# Altium PCB BLDC_BridgeBoard_V1_PCB.PcbDoc
Units mm, origin at the board's own origin, x right, y up, seen from the top; angles counter-clockwise.
Board outline 100 x 87 mm, 4 copper layers (Top Layer, Int1 (GND), Int2 (V12), Bottom Layer), stack 1.369 mm thick; 79 components, 44 nets, 261 pads, 93 vias.
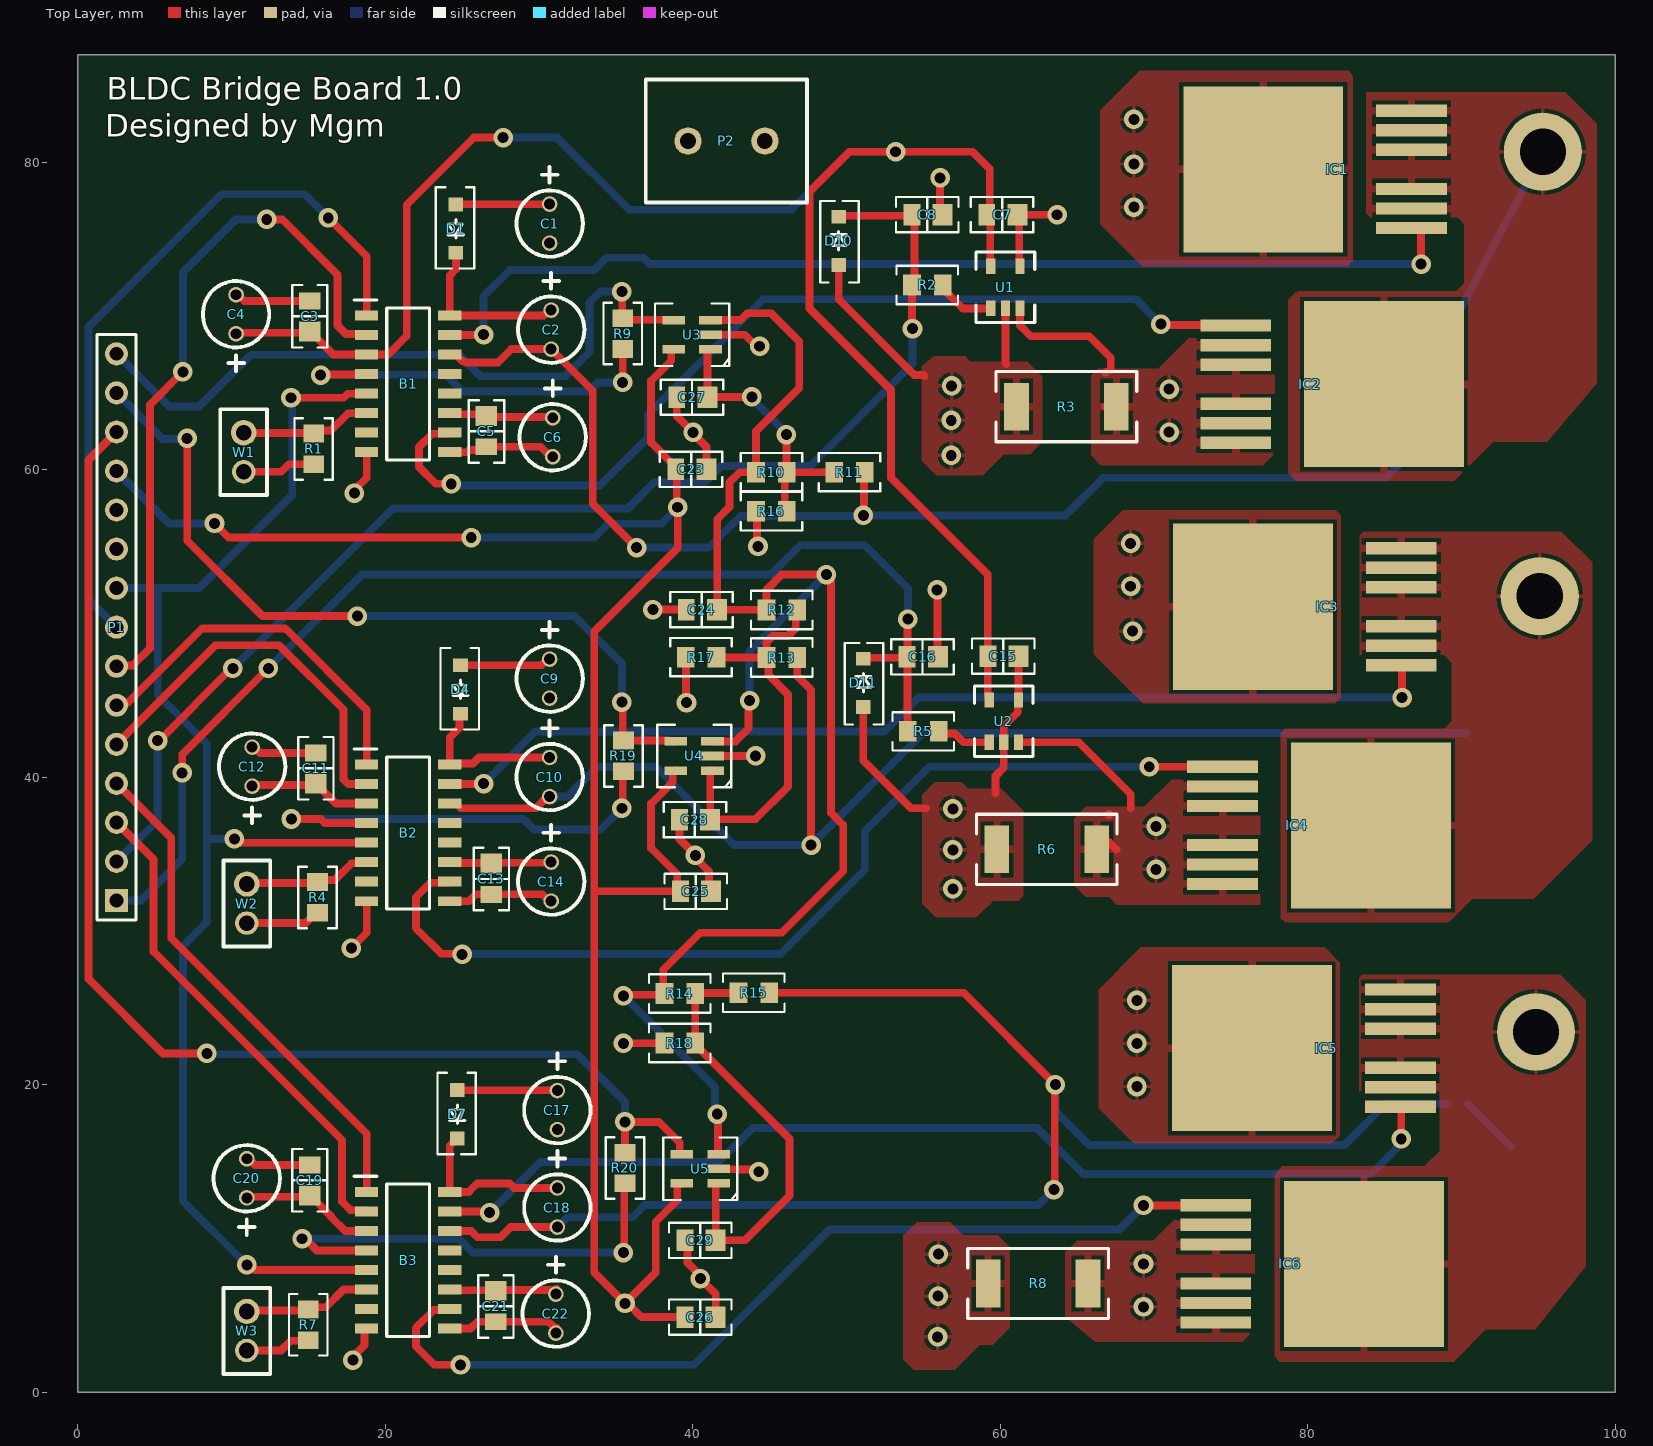
[diagram p0: Top Layer view]
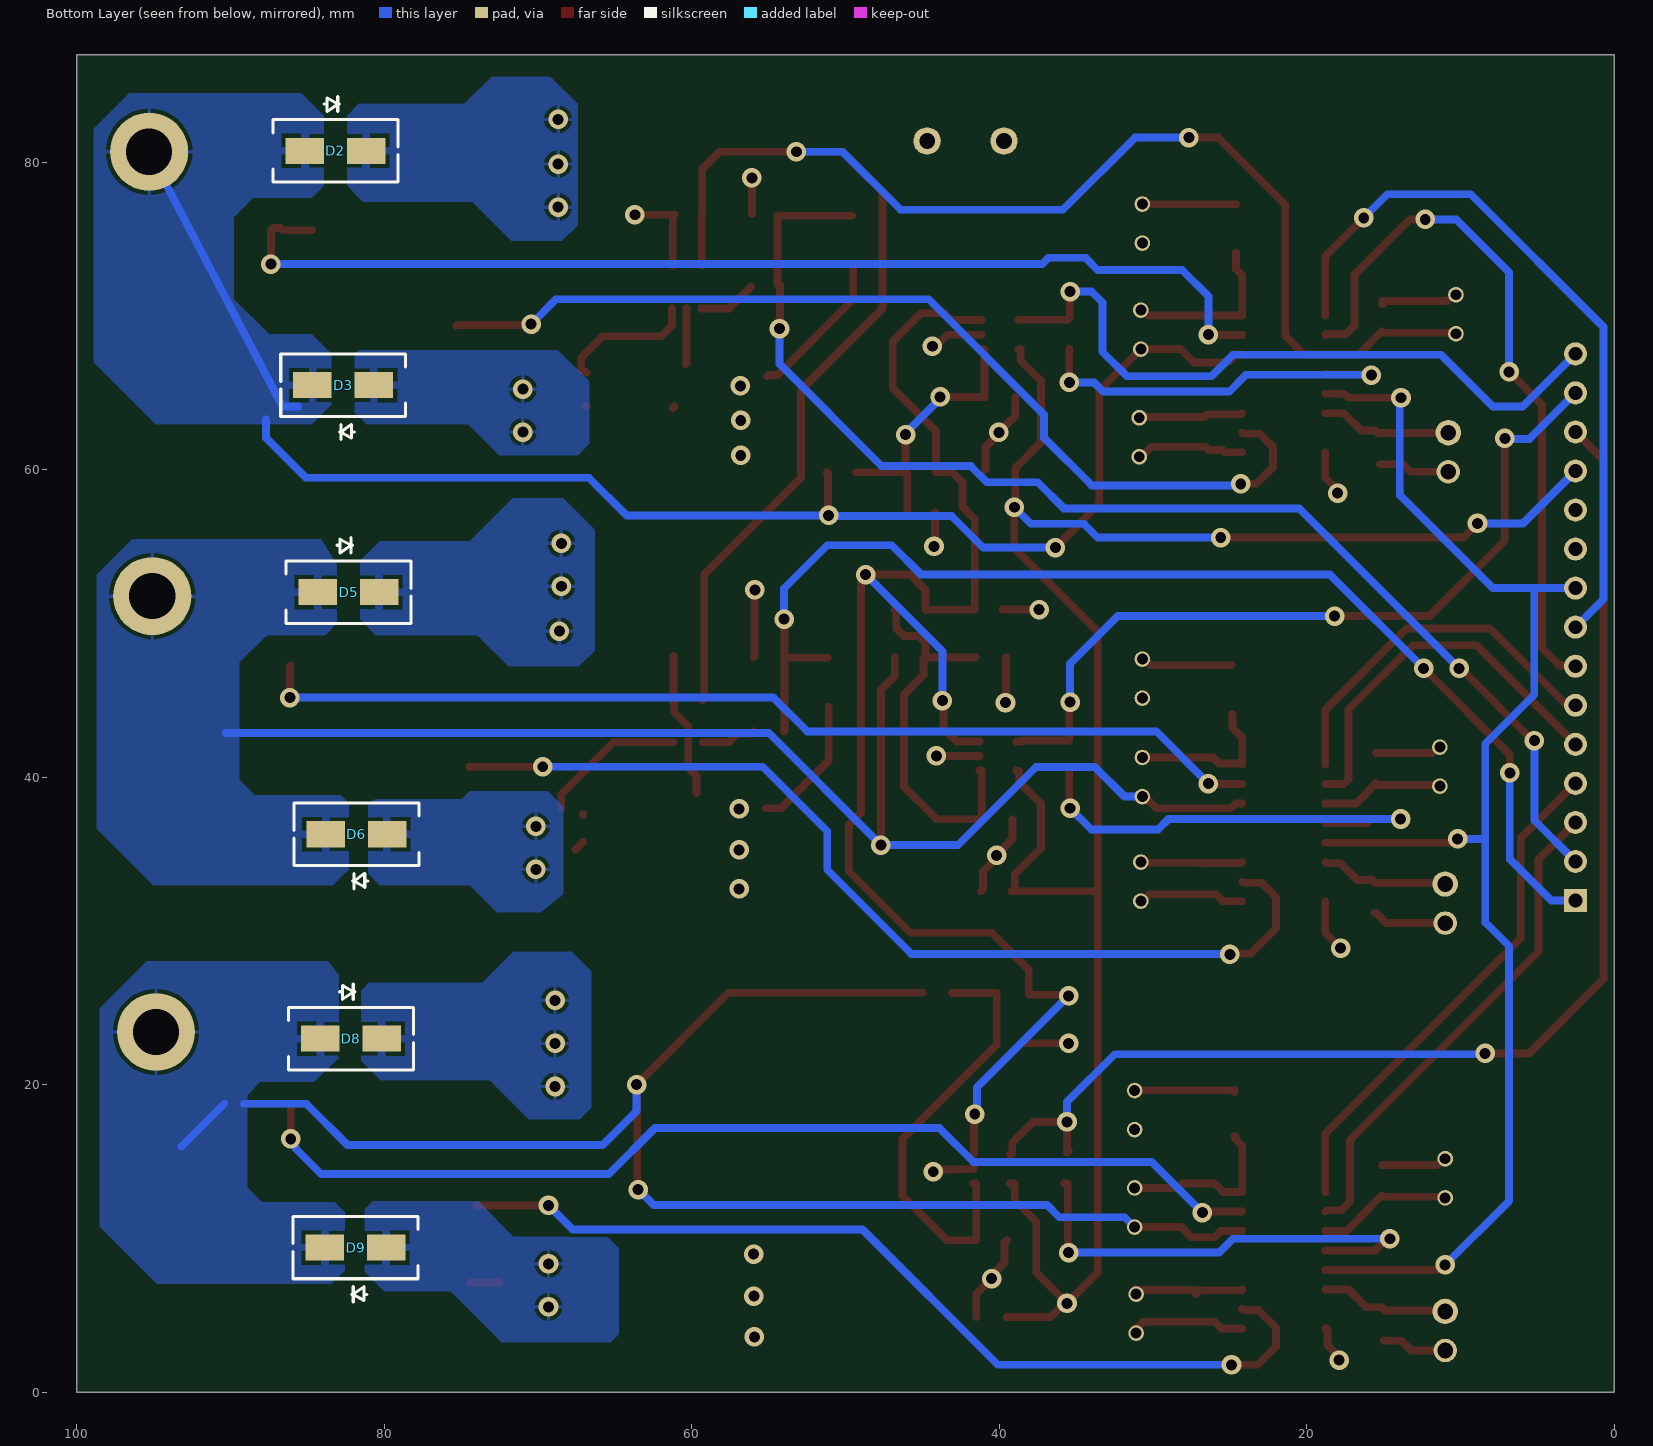
[diagram p1: Bottom Layer view, seen from below]
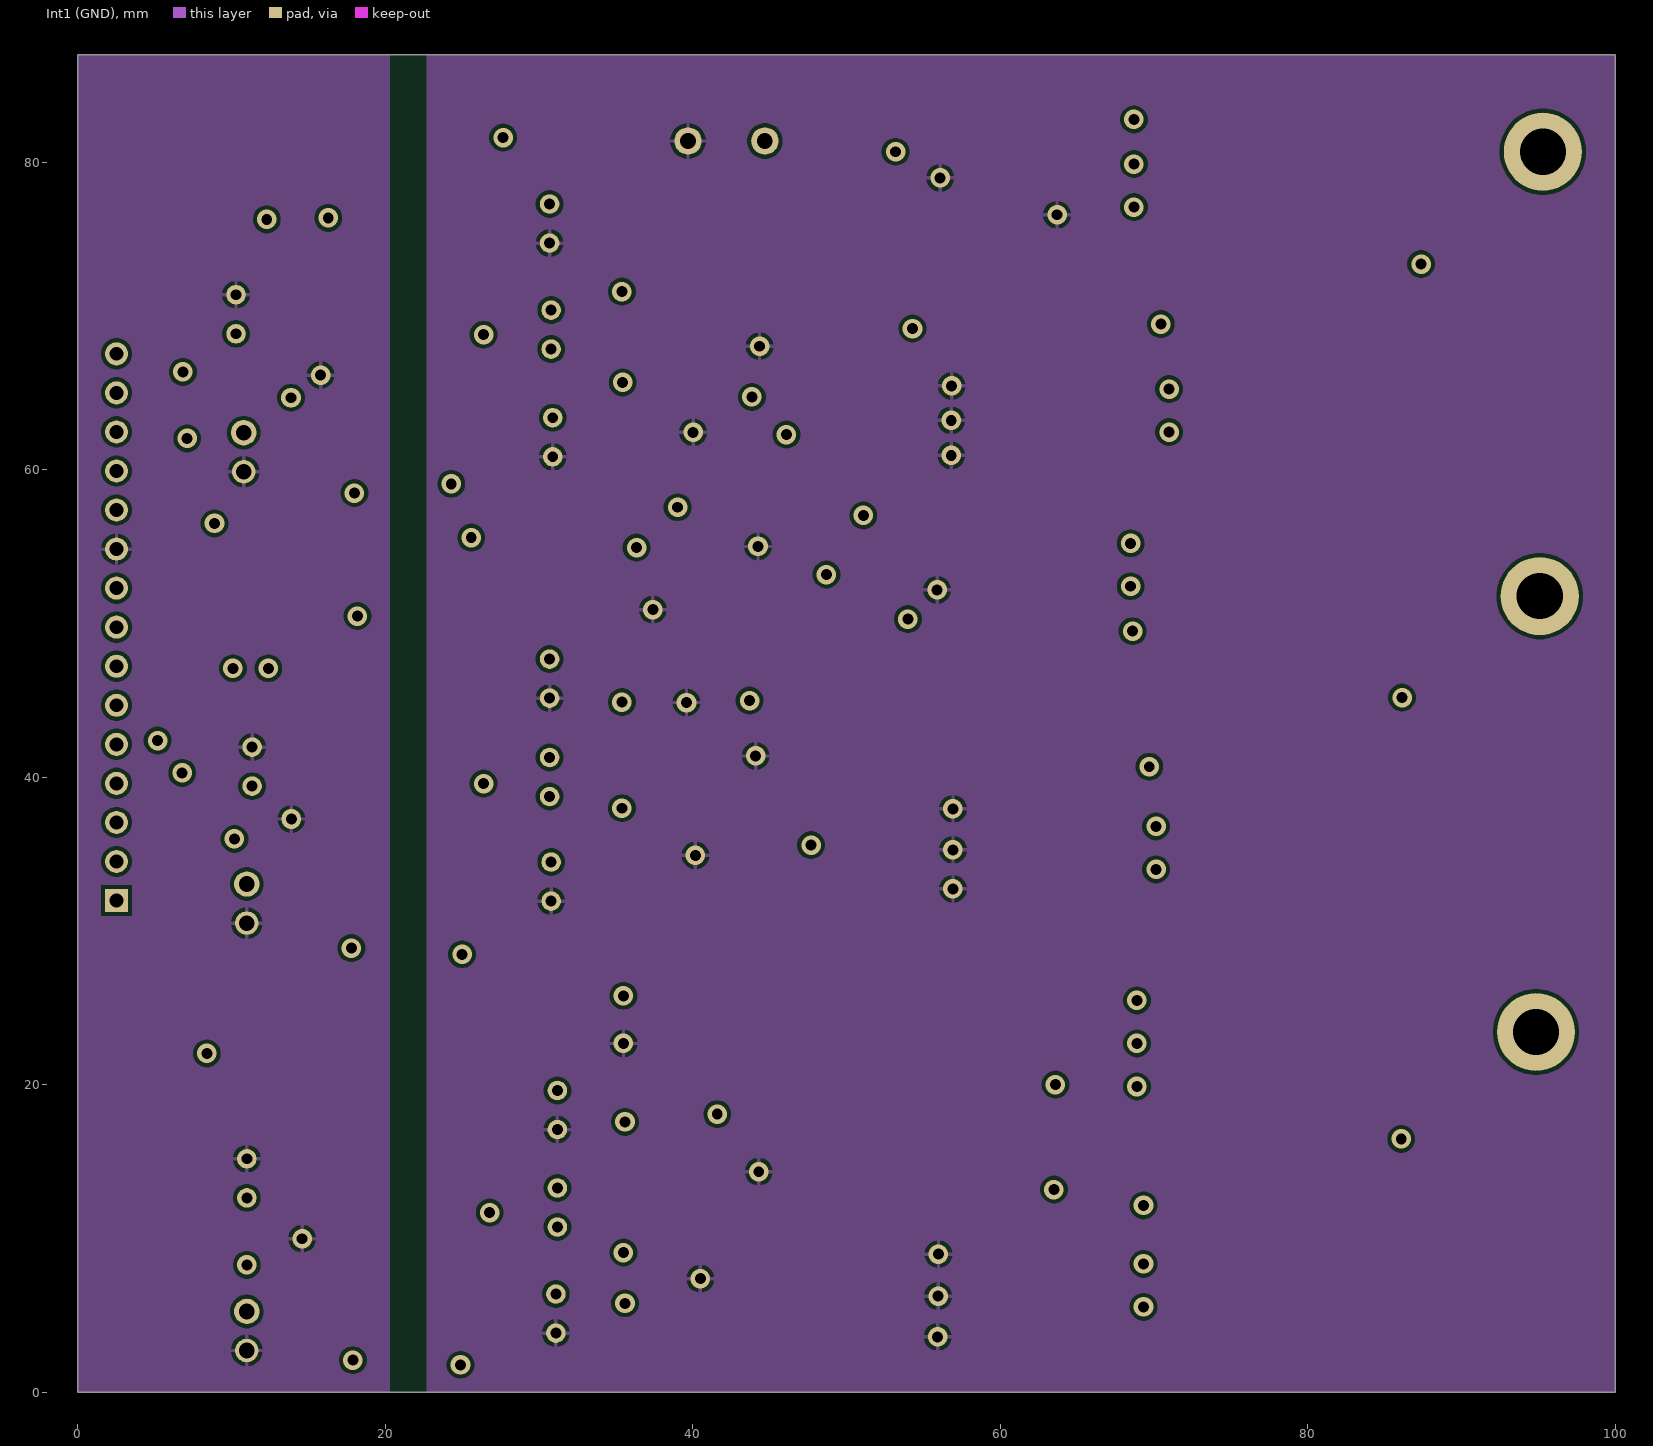
[diagram p2: Int1 (GND)]
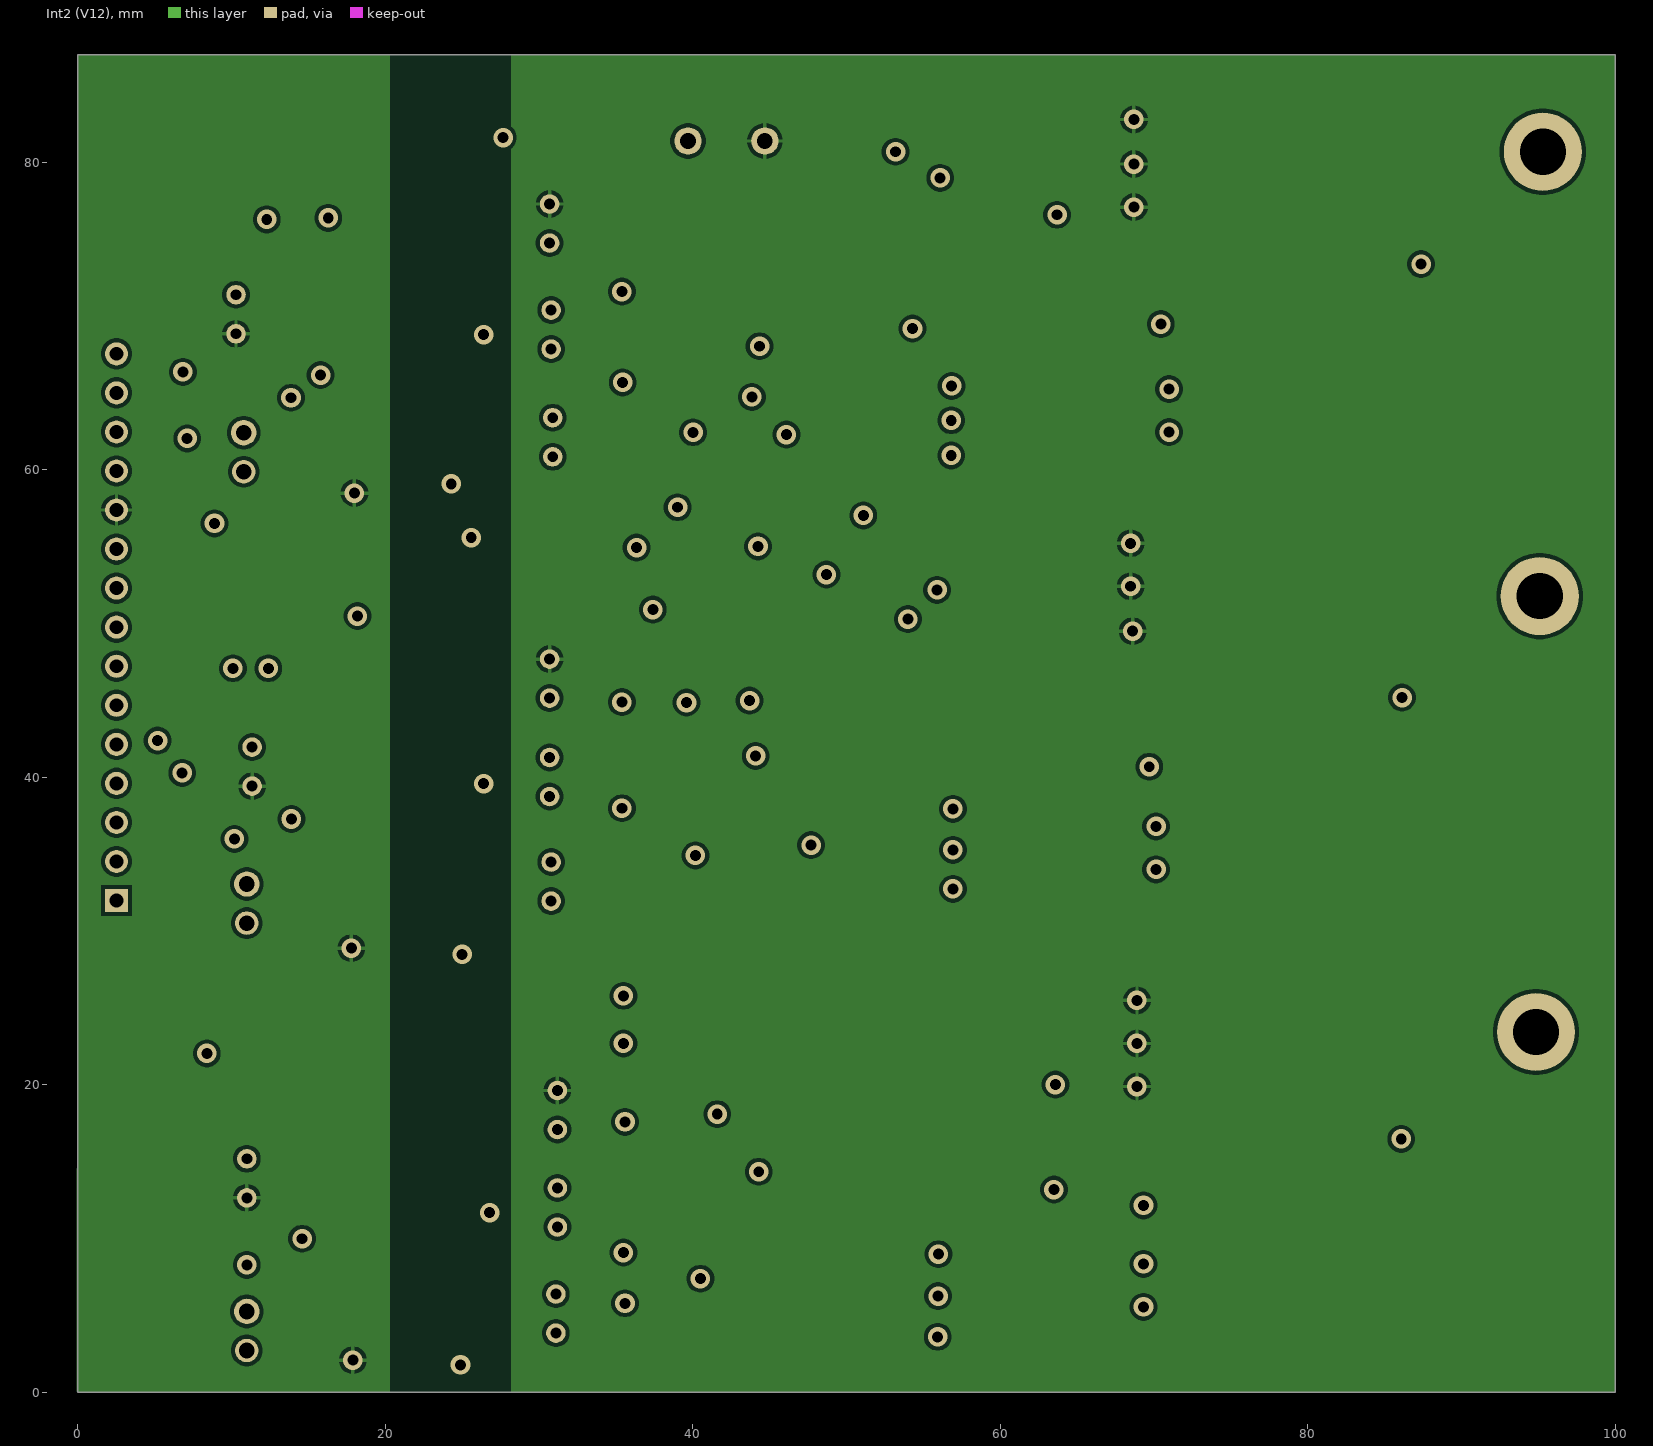
[diagram p3: Int2 (V12)]
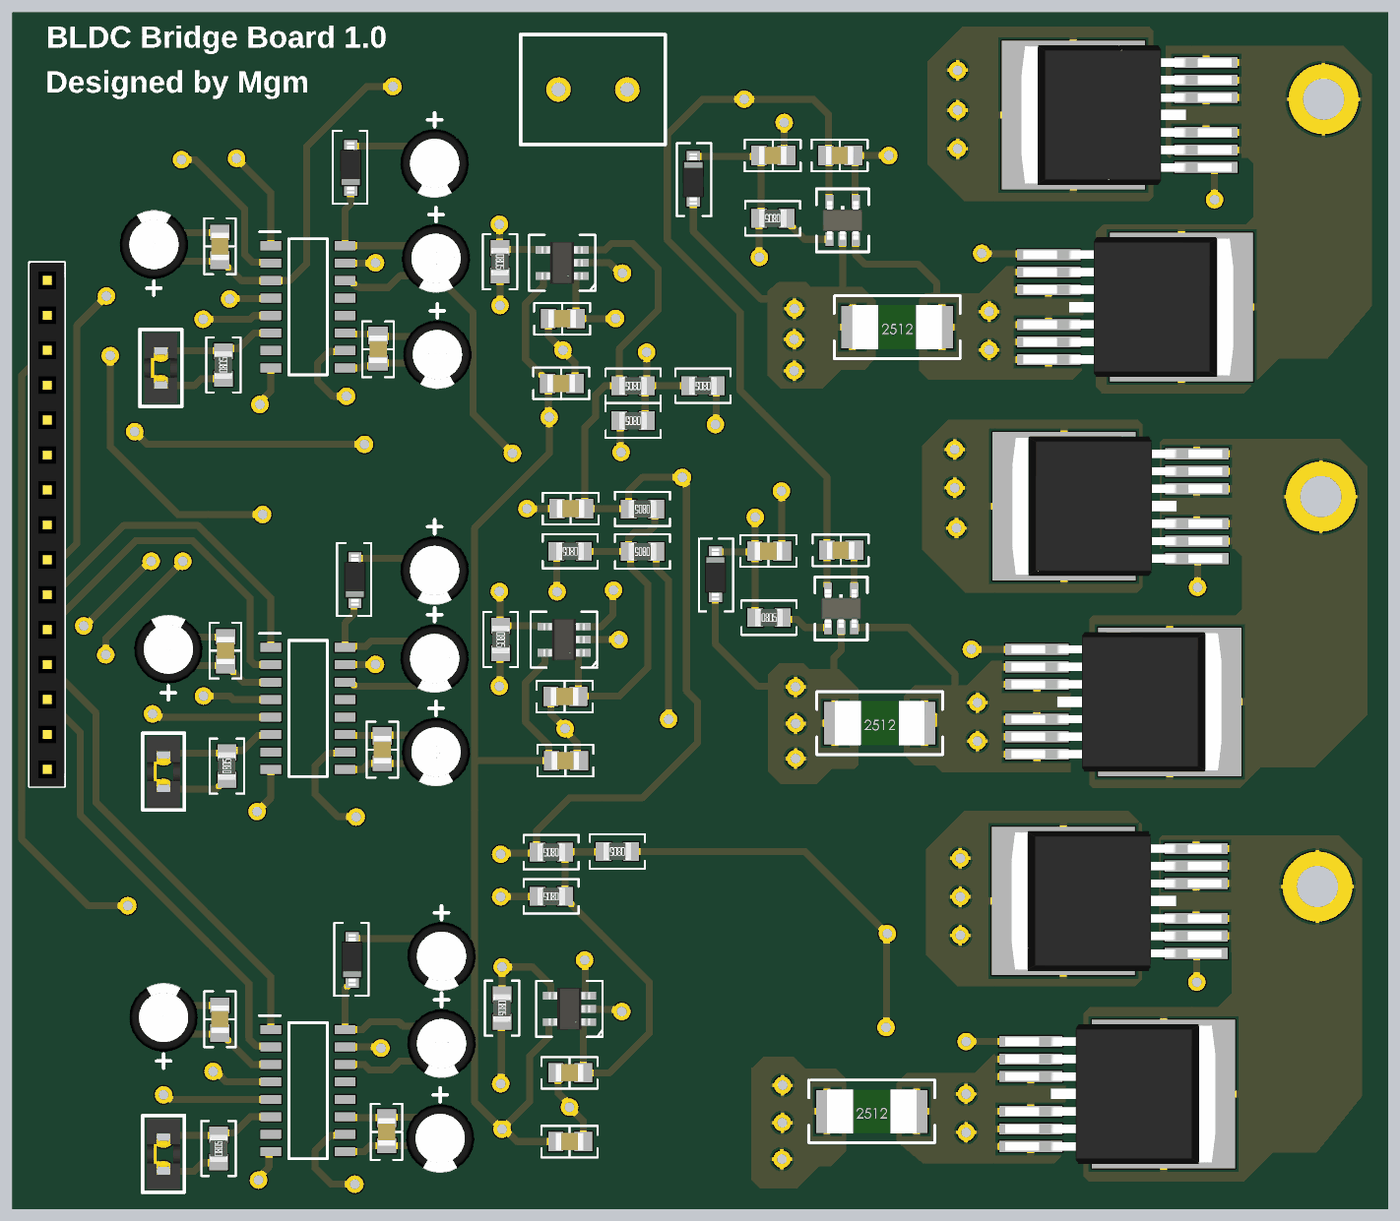
[diagram p4: 3D render of the assembled board from above, using the file's embedded part models]
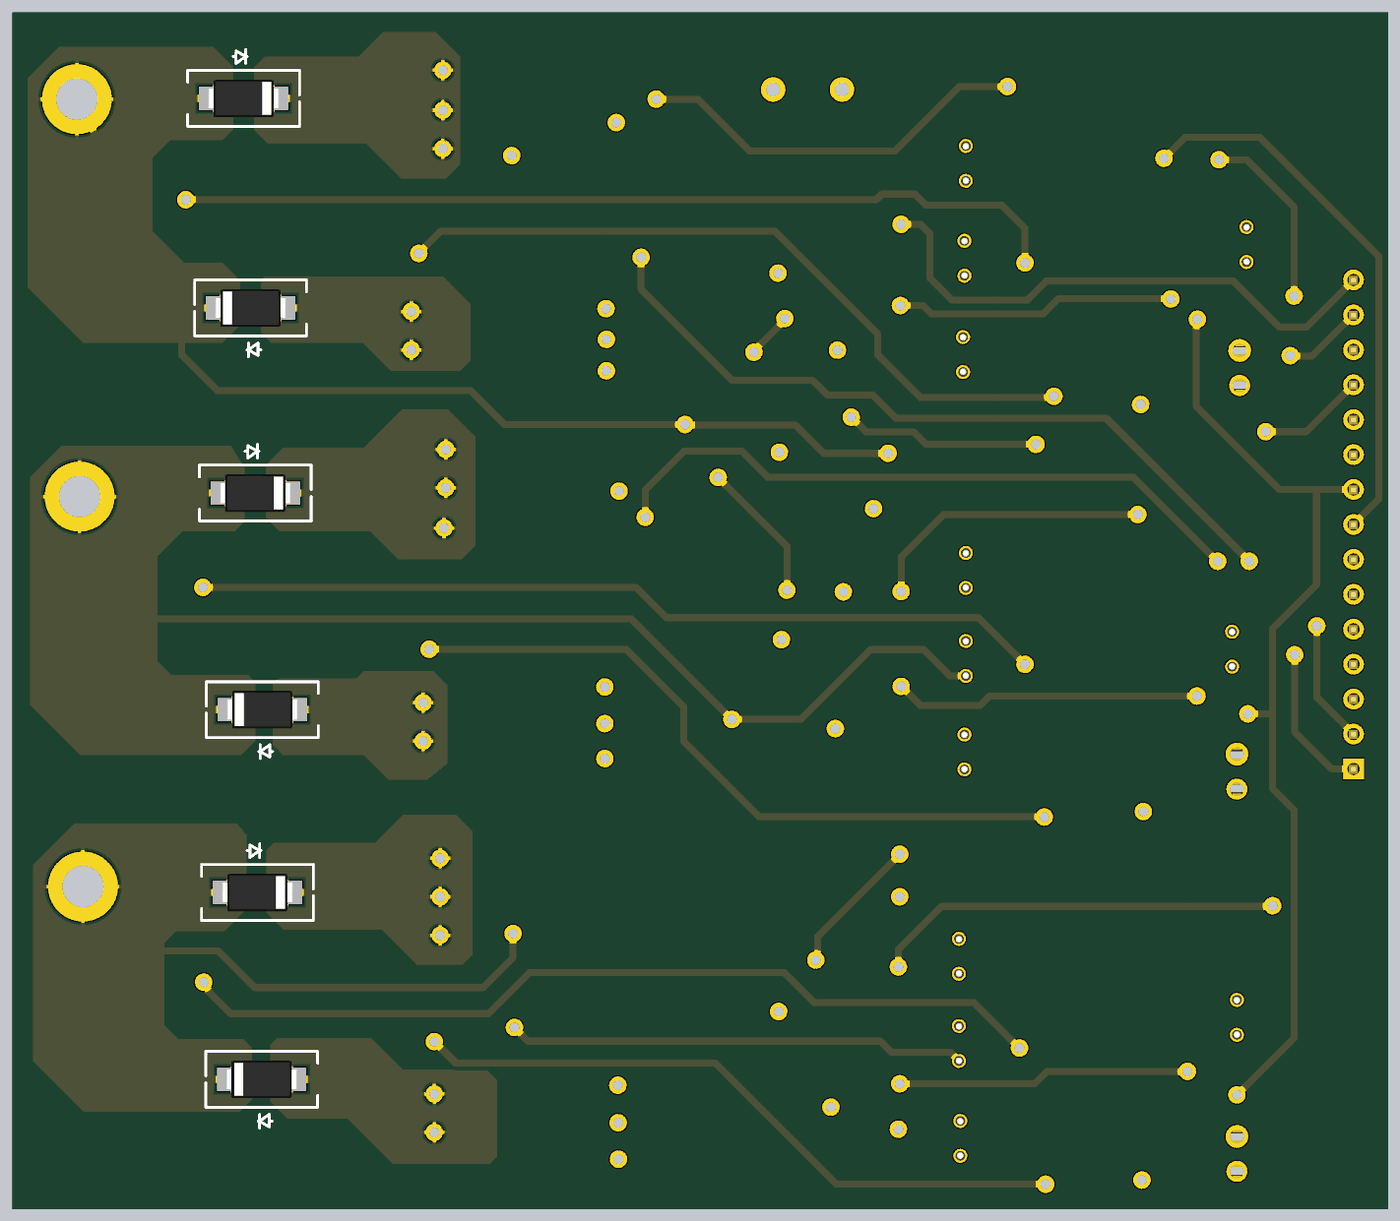
[diagram p5: 3D render of the assembled board from below, using the file's embedded part models]

## Layer stack, top to bottom
Top Solder: solder mask 0.0254, SM-001, Dk 4
Top Layer: signal copper 0.035
Dielectric 1: prepreg 0.1295, PP-017, Dk 4.3
Dielectric 2: prepreg 0.1295, PP-017, Dk 4.3
Int1 (GND): signal copper 0.035
Dielectric 3: core 0.7112, Core-039, Dk 4.8
Int2 (V12): signal copper 0.035
Dielectric 4: prepreg 0.1295, PP-017, Dk 4.3
Dielectric 5: prepreg 0.1295, PP-017, Dk 4.3
Bottom Layer: signal copper 0.035
Bottom Solder: solder mask 0.0254, SM-001, Dk 4

## Board outline
0,0 100,0 100,87 0,87

## Design rules (kind name [scope] priority, off if disabled: settings)
Clearance [All] p1: gap=0.254 ignorepadtopadclearanceinfootprint=FALSE except(0: Arc-Hole Track-Hole SMDPad-Hole THPad-Hole Via-Hole Fill-Hole Poly-Hole Region-Hole Text-Hole)
HoleSize [All] p1: absolutevalues=TRUE maxlimit=4 minlimit=0.025 maxpercent=80.000 minpercent=20.000
MinimumSolderMaskSliver [All] p1: minsoldermaskwidth=0.22
PolygonConnect PolygonConnect_2 [(IsNamedPolygon('PolygonBigThermal'))] p1: thpad.connectstyle=Relief thpad.reliefconductorwidth=2 thpad.reliefentries=4 thpad.polygonreliefangle="90 Angle" thpad.airgapwidth=0.254 smdpad.connectstyle=Relief smdpad.reliefconductorwidth=2 smdpad.reliefentries=4 smdpad.polygonreliefangle="90 Angle" smdpad.airgapwidth=0.254 via.connectstyle=Direct via.reliefconductorwidth=0.254 via.reliefentries=4 via.polygonreliefangle="90 Angle" via.airgapwidth=0.254
PolygonConnect PolygonConnect_1 [(IsNamedPolygon('PolygonDirect'))] p2: connectstyle=Direct reliefconductorwidth=2 reliefentries=4 polygonreliefangle="90 Angle" airgapwidth=0.254
PolygonConnect [All] p3: thpad.connectstyle=Relief thpad.reliefconductorwidth=0.254 thpad.reliefentries=4 thpad.polygonreliefangle="90 Angle" thpad.airgapwidth=0.254 smdpad.connectstyle=Relief smdpad.reliefconductorwidth=0.508 smdpad.reliefentries=4 smdpad.polygonreliefangle="90 Angle" smdpad.airgapwidth=0.254 via.connectstyle=Relief via.reliefconductorwidth=0.254 via.reliefentries=4 via.polygonreliefangle="90 Angle" via.airgapwidth=0.254
RoutingVias [All] p1: holewidth=0.711 width=1.27 viastyle="Through Hole" minholewidth=0.711 minwidth=1.27 maxholewidth=0.711 maxwidth=1.27
SolderMaskExpansion [All] p1: expansion=0.102 istentingtop=FALSE
UnRoutedNet [All] p1: checkbadconnections=TRUE
Width [All] p1: maxlimit=0.762 minlimit=0.254 preferedwidth=0.508 midlayer1_maxwidth=0.254 midlayer1_prefwidth=0.254 midlayer2_maxwidth=0.254 midlayer2_prefwidth=0.254 minimp=50.000000 maximp=50.000000 favimp=50.000000
27 further rules are at their usual default settings.

## Classes and differential pairs
component class U_5_ZeroCrossingDetector: C23 C24 C25 C26 C27 C28 C29 R9 R10 R11 R12 R13 R14 R15 R16 R17 R18 R19 R20 U3 U4 U5
component class U_4_Connectors: P1 P2
component class U_3_FET_C: B3 C17 C18 C19 C20 C21 C22 D7 D8 D9 IC5 IC6 R7 R8 W3
component class U_2_FET_B: B2 C9 C10 C11 C12 C13 C14 C15 C16 D4 D5 D6 D11 IC3 IC4 R4 R5 R6 U2 W2
component class U_1_FET_A: B1 C1 C2 C3 C4 C5 C6 C7 C8 D1 D2 D3 D10 IC1 IC2 R1 R2 R3 U1 W1

## Components (designator, comment, footprint, x,y, rotation, side; value= is the part's Value field where it differs from the comment)
B1 "SI8238BB-D-IS1" SOIC127P600X175-16N 21.5,65.6 r0 top
B2 "SI8238BB-D-IS1" SOIC127P600X175-16N 21.5,36.395 r0 top
B3 "SI8238BB-D-IS1" SOIC127P600X175-16N 21.5,8.6 r0 top
C1 "Cap Pol1" CAPACITORRADIALELECTROLYTIC 30.7,77.3 r270 top value=1uF
C2 "Cap Pol1" CAPACITORRADIALELECTROLYTIC 30.8,70.4 r270 top value=CB
C3 "0.1 µF" "CAP 0805_2012" 15.1,70 r270 top
C4 "Cap Pol1" CAPACITORRADIALELECTROLYTIC 10.3,68.86 r90 top value=1uF
C5 "0.1 µF" "CAP 0805_2012" 26.588,62.512 r90 top
C6 "Cap Pol1" CAPACITORRADIALELECTROLYTIC 30.9,63.4 r270 top value=10uF
C7 "0.1 µF" "CAP 0805_2012" 60.128,76.608 r0 top
C8 "1 nF" "CAP 0805_2012" 55.264,76.608 r0 top
C9 "Cap Pol1" CAPACITORRADIALELECTROLYTIC 30.7,47.7 r270 top value=1uF
C10 "Cap Pol1" CAPACITORRADIALELECTROLYTIC 30.7,41.3 r270 top value=CB
C11 "0.1 µF" "CAP 0805_2012" 15.5,40.6 r270 top
C12 "Cap Pol1" CAPACITORRADIALELECTROLYTIC 11.35,39.435 r90 top value=1uF
C13 "0.1 µF" "CAP 0805_2012" 26.9,33.4 r90 top
C14 "Cap Pol1" CAPACITORRADIALELECTROLYTIC 30.8,34.5 r270 top value=10uF
C15 "0.1 µF" "CAP 0805_2012" 60.2,47.9 r0 top
C16 "1 nF" "CAP 0805_2012" 54.954,47.843 r0 top
C17 "Cap Pol1" CAPACITORRADIALELECTROLYTIC 31.2,19.64 r270 top value=1uF
C18 "Cap Pol1" CAPACITORRADIALELECTROLYTIC 31.2,13.3 r270 top value=CB
C19 "0.1 µF" "CAP 0805_2012" 15.1,13.8 r270 top
C20 "Cap Pol1" CAPACITORRADIALELECTROLYTIC 11,12.66 r90 top value=1uF
C21 "0.1 µF" "CAP 0805_2012" 27.2,5.6 r90 top
C22 "Cap Pol1" CAPACITORRADIALELECTROLYTIC 31.1,6.4 r270 top value=10uF
C23 "1 nF" "CAP 0805_2012" 39.901,60.038 r0 top
C24 "1 nF" "CAP 0805_2012" 40.584,50.922 r0 top
C25 "1 nF" "CAP 0805_2012" 40.2,32.6 r0 top
C26 "1 nF" "CAP 0805_2012" 40.5,4.9 r0 top
C27 "1 nF" "CAP 0805_2012" 39.964,64.736 r0 top
C28 "1 nF" "CAP 0805_2012" 40.144,37.263 r0 top
C29 "1 nF" "CAP 0805_2012" 40.5,9.9 r0 top
D1 "B5819W-TP" SOD-123 24.6,75.7 r270 top
D2 "SK510A-LTP" "DO214AC SMA" 83.186,80.758 r180 bottom
D3 "SK510A-LTP" "DO214AC SMA" 82.678,65.518 r0 bottom
D4 "B5819W-TP" SOD-123 24.9,45.725 r270 top
D5 "SK510A-LTP" "DO214AC SMA" 82.332,52.056 r180 bottom
D6 "SK510A-LTP" "DO214AC SMA" 81.824,36.308 r0 bottom
D7 "B5819W-TP" SOD-123 24.7,18.1 r270 top
D8 "SK510A-LTP" "DO214AC SMA" 82.176,23.016 r180 bottom
D9 "SK510A-LTP" "DO214AC SMA" 81.872,9.427 r0 bottom
D10 "BZT52C3V0-TP" SOD-123 49.5,74.9 r90 top
D11 "BZT52C3V0-TP" SOD-123 51.1,46.15 r90 top
IC1 "IRFS3006TRL7PP" "INFINEON TO-263-7" 80.987,79.552 r180 top
IC2 "IRFS3006TRL7PP" "INFINEON TO-263-7" 81.095,65.582 r0 top
IC3 "IRFS3006TRL7PP" "INFINEON TO-263-7" 80.314,51.104 r180 top
IC4 "IRFS3006TRL7PP" "INFINEON TO-263-7" 80.241,36.88 r0 top
IC5 "IRFS3006TRL7PP" "INFINEON TO-263-7" 80.26,22.394 r180 top
IC6 "IRFS3006TRL7PP" "INFINEON TO-263-7" 79.792,8.36 r0 top
P1 "Header 15" HDR1X15 2.526,31.996 r90 top
P2 "Header 2" "SCREW HEADER 2 (5 MM PITCH)" 42.2,81.4 r0 top
R1 "RDT" "RES 0805_2012" 15.35,61.375 r90 top
R2 "1 kOhms" "RES 0805_2012" 55.264,72.036 r180 top
R3 "60 mOhms" "STACKPOLE CSR2512" 64.314,64.121 r0 top value="500 µOhms"
R4 "RDT" "RES 0805_2012" 15.6,32.2 r90 top
R5 "1 kOhms" "RES 0805_2012" 55,43 r0 top
R6 "60 mOhms" "STACKPOLE CSR2512" 63.042,35.324 r0 top value="500 µOhms"
R7 "RDT" "RES 0805_2012" 15,4.4 r90 top
R8 "60 mOhms" "STACKPOLE CSR2512" 62.466,7.09 r0 top value="500 µOhms"
R9 "10 k" "RES 0805_2012" 35.45,68.875 r270 top
R10 "47 k" "RES 0805_2012" 45.121,59.858 r180 top
R11 "47 k" "RES 0805_2012" 50.201,59.858 r180 top
R12 "47 k" "RES 0805_2012" 45.8,50.9 r180 top
R13 "47 k" "RES 0805_2012" 45.8,47.8 r180 top
R14 "47 k" "RES 0805_2012" 39.167,25.948 r180 top
R15 "47 k" "RES 0805_2012" 43.979,25.997 r180 top
R16 "10 k" "RES 0805_2012" 45.121,57.318 r180 top
R17 "10 k" "RES 0805_2012" 40.55,47.825 r180 top
R18 "10 k" "RES 0805_2012" 39.167,22.73 r180 top
R19 "10 k" "RES 0805_2012" 35.5,41.4 r270 top
R20 "10 k" "RES 0805_2012" 35.6,14.6 r270 top
U1 "INA180A1IDBVR" DBV0005A_N 60.344,71.887 r90 top
U2 "INA180A1IDBVR" DBV0005A_N 60.236,43.662 r90 top
U3 "LMV321IDBVR" DBV5 39.964,68.8 r180 top
U4 "LMV321IDBVR" DBV5 40.1,41.4 r180 top
U5 "LMV321IDBVR" DBV5 40.494,14.55 r180 top
W1 "Jumper" JUMPER_2_POS 10.8,61.155 r90 top
W2 "Jumper" JUMPER_2_POS 11,31.8 r90 top
W3 "Jumper" JUMPER_2_POS 11,4 r90 top

## Footprints (in the part's own frame and the unit in brackets; to place one, negate y for a bottom-side part, rotate by r counter-clockwise, add the part's x,y. Pads: shape width x height; smd on the part's side, far side on the other; paste and mask are expansions set on the pad)
"CAP 0805_2012" [mm] "Chip Capacitor, 2-Leads, Body 2.00x1.20mm, IPC Medium Density"
  rect 1.1x1.4 smd: 1(-1,0)
  rect 1.3x1.4 smd: 2(1,0)
  silkscreen extent -2.03,-1.15 2.03,1.14, body extent -1,-0.64 1,0.64, height 1.26
CAPACITORRADIALELECTROLYTIC [mil]
  round 40 / inner round 50 / far side round 40 hole 28: 1(0,0) 2(100,0)
  silkscreen extent -95,-85 135,85, body extent -48,-98 148,98, height 493
DBV5 [mil]
  rect 58x22 smd mask-99999: 1(-47,37.4) 2(-47,0) 3(-47,-37.4) 4(47,-37.4) 5(47,37.4)
  silkscreen extent -95,-80 95,80, body extent -59,-60 59,60, height 57
DBV0005A_N [mm]
  rect 1x0.6 smd paste+0 mask+0.051: 1(-1.375,0.95) 2(-1.375,0) 3(-1.375,-0.95) 4(1.375,-0.95) 5(1.375,0.95)
  silkscreen extent -2.29,-1.91 2.29,1.91, body extent -1.4,-1.45 1.4,1.45, height 1.2
"DO214AC SMA" [mm] "Molded Diode, 2-Leads, Body 4.30x2.60mm, IPC Medium Density"
  rect 2.5x1.7 smd: 1(-2,0) 2(2,0)
  silkscreen extent -4.06,-2.03 4.06,3.55, body extent -2.6,-1.37 2.6,1.37, height 2.4
HDR1X15 [mm] "Connector; Header; 15 Position"
  rect 1.5x1.5 hole 0.9: 1(0,0)
  round 1.5 hole 0.9: 2(2.54,0) 3(5.08,0) 4(7.62,0) 5(10.16,0) 6(12.7,0) 7(15.24,0) 8(17.78,0) 9(20.32,0) 10(22.86,0) 11(25.4,0) 12(27.94,0) 13(30.48,0) 14(33.02,0) 15(35.56,0)
  silkscreen extent -1.27,-1.27 36.83,1.27, body extent -1.3,-1.29 36.8,1.25, height 8.13
"INFINEON TO-263-7" [mm] "D2-PAK, 7-Pads, Body 7.82x8.52mm (max), IPC Medium Density"
  rect 4.6x0.8 smd: 1(-5.775,3.81) 2(-5.775,2.54) 3(-5.775,1.27) 5(-5.775,-1.27) 6(-5.775,-2.54) 7(-5.775,-3.81)
  rect 10.4x10.8 smd: 8(3.875,0)
  body extent -7.62,-5.08 7.63,5.08, height 4.54
JUMPER_2_POS [mil] "2 pins jumper."
  round 60 hole 40: 1(-50,0)
  round 65 hole 40: 2(50,0)
  silkscreen extent -110,-60 110,60, body extent -102,-47 102,47, height 265
"RES 0805_2012" [mm] "Chip Resistor, 2-Leads, Body 2.00x1.25mm, IPC Medium Density"
  rect 1.15x1.35 smd: 1(-1,0) 2(1,0)
  silkscreen extent -2,-1.25 2,1.25, body extent -1,-0.62 1,0.63, height 0.6
"SCREW HEADER 2 (5 MM PITCH)" [mil]
  round 70 hole 40: 1(-98.43,0) 2(98.43,0)
  silkscreen extent -207,-157 207,157, body extent -198,-177 219,177, height 516
SOD-123 [mm] "SOD, 2-Leads, Body 1.55x3.70mm, IPC Medium Density"
  rect 0.9x0.95 smd: 1(-1.575,0) 2(1.575,0)
  silkscreen extent -2.7,-1.3 2.6,1.2, body extent -1.86,-0.78 1.86,0.77, height 1.35
SOIC127P600X175-16N [mm]
  rect 1.5x0.65 smd: 1(-2.7,4.445) 2(-2.7,3.175) 3(-2.7,1.905) 4(-2.7,0.635) 5(-2.7,-0.635) 6(-2.7,-1.905) 7(-2.7,-3.175) 8(-2.7,-4.445) 9(2.7,-4.445) 10(2.7,-3.175) 11(2.7,-1.905) 12(2.7,-0.635) 13(2.7,0.635) 14(2.7,1.905) 15(2.7,3.175) 16(2.7,4.445)
  silkscreen extent -3.53,-4.95 1.4,5.46
"STACKPOLE CSR2512" [mm] "Chip Resistor, 2-Leads, Body 6.40x3.20mm, IPC Medium Density"
  rect 1.6x3.1 smd: 1(-3.25,0) 2(3.25,0)
  silkscreen extent -4.57,-2.29 4.57,2.29, body extent -3.27,-1.6 3.28,1.6, height 0.5

## Part data
B1 B2 B3: "SILICON LABS - SI8238BB-D-IS1 - DIGITAL ISOLATOR, 30NS, NSOIC-16", Manufacturer_Name="Silicon Labs", Mouser Part Number=634-SI8238BB-D-IS1, Arrow Part Number=SI8238BB-D-IS1, Arrow Price/Stock=https://www.arrow.com/en/products/si8238bb-d-is1/silicon-labs, Datasheet Link=https://datasheet.datasheetarchive.com/originals/distributors/DKDS-37/728994.pdf, Geometry.Height=1.75mm, Manufacturer_Part_Number=SI8238BB-D-IS1, Mouser Price/Stock=https://www.mouser.co.uk/ProductDetail/Silicon-Labs/SI8238BB-D-IS1?qs=p9T7GgSe1IEr3RhvGCWqzw%3D%3D
C1 C2 C4 C6 C9 C10 C12 C14 C17 C18 C20 C22: "Polarized Capacitor (Radial)", LatestRevisionDate=17-Jul-2002, LatestRevisionNote="Re-released for DXP Platform.", PackageDescription="Polarized Capacitor (Radial); 2 Leads", PackageReference=RB7.6-15, Published=8-Jun-2000, Publisher="Altium Limited"
C3 C5 C7 C11 C13 C15 C19 C21: library part CC0805MRX7R9BB104, "CAP CER 0.1UF 50V X7R 0805", Device Package="0805 (2012 Metric)", Manufacturer=Yageo, Operating Temperature="-55°C ~ 125°C", Supplier Part Number 1=311-4351-1-ND, Temperature Coefficient=X7R, Tolerance=±20%, Voltage - Rated=50V, Applications="General Purpose", Capacitance="0.1 µF", ComponentLink1Description=Datasheet, ComponentLink1URL=https://www.yageo.com/upload/media/product/productsearch/datasheet/mlcc/UPY-GPHC_X7R_6.3V-to-50V_18.pdf, ComponentLink2Description="DigiKey Link", ComponentLink2URL=https://www.digikey.com/en/products/detail/yageo/CC0805MRX7R9BB104/5884281, LastUpdated="15/11/2023 20:14:20", Lifecycle Status=Active, Minimum Order=1, Mounting Type="Surface Mount, MLCC", Package / Case="0805 (2012 Metric)", Packaging=TapeAndReel, Part Number=CC0805MRX7R9BB104, Part Status=Active, PartId=2475, Price=0.01, Series=CC, Size / Dimension="0.079\" L x 0.049\" W (2.00mm x 1.25mm)", Supplier 1=DigiKey, Thickness (Max)="0.037\" (0.95mm)"
C8 C16 C23 C24 C25 C26 C27 C28 C29: library part CC0805MRX7R9BB104, "CAP CER 0.1UF 50V X7R 0805", Capacitance="0.1 µF", Device Package="0805 (2012 Metric)", Manufacturer=Yageo, Operating Temperature="-55°C ~ 125°C", Supplier Part Number 1=311-4351-1-ND, Temperature Coefficient=X7R, Tolerance=±20%, Voltage - Rated=50V, Applications="General Purpose", ComponentLink1Description=Datasheet, ComponentLink1URL=https://www.yageo.com/upload/media/product/productsearch/datasheet/mlcc/UPY-GPHC_X7R_6.3V-to-50V_18.pdf, ComponentLink2Description="DigiKey Link", ComponentLink2URL=https://www.digikey.com/en/products/detail/yageo/CC0805MRX7R9BB104/5884281, LastUpdated="15/11/2023 20:14:20", Lifecycle Status=Active, Minimum Order=1, Mounting Type="Surface Mount, MLCC", Package / Case="0805 (2012 Metric)", Packaging=TapeAndReel, Part Number=CC0805MRX7R9BB104, Part Status=Active, PartId=2475, Price=0.01, Series=CC, Size / Dimension="0.079\" L x 0.049\" W (2.00mm x 1.25mm)", Supplier 1=DigiKey, Thickness (Max)="0.037\" (0.95mm)"
D1 D4 D7: "DIODE SCHOTTKY 40V 1A SOD123", Capacitance @ Vr, F="120pF @ 4V, 1MHz", Current - Average Rectified (Io)=1A, Current - Reverse Leakage @ Vr="1 mA @ 40 V", Manufacturer="Micro Commercial Co", Operating Temperature - Junction="-65°C ~ 125°C", Package / Case=SOD-123, Supplier Part Number 1=B5819W-TPMSCT-ND, Voltage - DC Reverse (Vr) (Max)="40 V", Voltage - Forward (Vf) (Max) @ If="600 mV @ 1 A", ComponentLink1Description=Datasheet, ComponentLink1URL=https://www.mccsemi.com/pdf/Products/B5817W-B5819W(SOD-123).pdf, ComponentLink2Description="DigiKey Link", ComponentLink2URL=https://www.digikey.com/en/products/detail/micro-commercial-co/B5819W-TP/3774959, Diode Type=Schottky, LastUpdated="29/12/2023 21:23:18", Lifecycle Status=Active, Minimum Order=1, Mounting Type="Surface Mount", Packaging=TapeAndReel, Part Number=B5819W-TP, Part Status=Active, PartId=2331, Price=0.03, Series=-, Speed="Fast Recovery =< 500ns, > 200mA (Io)", Supplier 1=DigiKey, Supplier Device Package=SOD-123
D2 D3 D5 D6 D8 D9: "DIODE SCHOTTKY 100V 5A DO214AC", Capacitance @ Vr, F="200pF @ 4V, 1MHz", Current - Average Rectified (Io)=5A, Current - Reverse Leakage @ Vr="1 mA @ 100 V", Manufacturer="Micro Commercial Co", Operating Temperature - Junction="-55°C ~ 150°C", Package / Case="DO-214AC, SMA", Supplier Device Package="DO-214AC (SMA)", Supplier Part Number 1=SK510A-LTPMSCT-ND, Voltage - DC Reverse (Vr) (Max)="100 V", Voltage - Forward (Vf) (Max) @ If="850 mV @ 5 A", ComponentLink1Description=Datasheet, ComponentLink1URL=https://www.mccsemi.com/pdf/Products/SK52A-L-SK510A-L(DO-214AC).pdf, ComponentLink2Description="DigiKey Link", ComponentLink2URL=https://www.digikey.com/en/products/detail/micro-commercial-co/SK510A-LTP/5114130, Diode Type=Schottky, LastUpdated="29/12/2023 21:23:09", Lifecycle Status=Active, Minimum Order=1, Mounting Type="Surface Mount", Packaging=TapeAndReel, Part Number=SK510A-LTP, Part Status=Active, PartId=2009, Price=0.08, Series=-, Speed="Fast Recovery =< 500ns, > 200mA (Io)", Supplier 1=DigiKey
D10 D11: "DIODE ZENER 3V 200MW SOD123", Current - Reverse Leakage @ Vr="10 µA @ 1 V", Manufacturer="Micro Commercial Co", Operating Temperature="-65°C ~ 150°C", Package / Case=SOD-123, Power - Max="200 mW", Supplier Part Number 1=BZT52C3V0-TPMSCT-ND, Tolerance=±7%, Voltage - Forward (Vf) (Max) @ If="900 mV @ 10 mA", Voltage - Zener (Nom) (Vz)="3 V", ComponentLink1Description=Datasheet, ComponentLink1URL=https://www.mccsemi.com/pdf/Products/BZT52C2V4~BZT52C51(500mW)(SOD-123).pdf, ComponentLink2Description="DigiKey Link", ComponentLink2URL=https://www.digikey.com/en/products/detail/micro-commercial-co/BZT52C3V0-TP/806039, Impedance (Max) (Zzt)="95 Ohms", LastUpdated="27/12/2023 21:24:01", Lifecycle Status=Active, Minimum Order=1, Mounting Type="Surface Mount", Packaging=TapeAndReel, Part Number=BZT52C3V0-TP, Part Status=Active, PartId=2097, Price=0.01, Series=-, Supplier 1=DigiKey, Supplier Device Package=SOD-123
IC1 IC2 IC3 IC4 IC5 IC6: "MOSFET N-CH 60V 240A D2PAK", Current - Continuous Drain (Id) @ 25°C="240A (Tc)", Drain to Source Voltage (Vdss)="60 V", Drive Voltage (Max Rds On,  Min Rds On)=10V, Input Capacitance (Ciss) (Max) @ Vds="8850 pF @ 50 V", Manufacturer="Infineon Technologies", Operating Temperature="-55°C ~ 175°C (TJ)", Package / Case="TO-263-7, D²Pak (6 Leads + Tab), TO-263CB", Power Dissipation (Max)="375W (Tc)", Supplier Device Package="D2PAK (7-Lead)", Supplier Part Number 1=IRFS3006TRL7PPCT-ND, ComponentLink1Description=Datasheet, ComponentLink1URL=https://www.infineon.com/dgdl/irfs3006-7ppbf.pdf?fileId=5546d462533600a4015356364189214d, ComponentLink2Description="DigiKey Link", ComponentLink2URL=https://www.digikey.com/en/products/detail/infineon-technologies/IRFS3006TRL7PP/2096605, FET Type=N-Channel, Gate Charge (Qg) (Max) @ Vgs="300 nC @ 10 V", LastUpdated="01/11/2023 20:47:46", Lifecycle Status=Active, Minimum Order=1, Mounting Type="Surface Mount", Packaging=TapeAndReel, Part Number=IRFS3006TRL7PP, Part Status=Active, Price=2.81, Rds On (Max) @ Id, Vgs="2.1mOhm @ 168A, 10V", Series=HEXFET®, Supplier 1=DigiKey, Technology="MOSFET (Metal Oxide)", Vgs (Max)=±20V, Vgs(th) (Max) @ Id="4V @ 250µA"
P1: "Header, 15-Pin", LatestRevisionDate=17-Jul-2002, LatestRevisionNote="Re-released for DXP Platform.", Publisher="Altium Limited"
P2: "Header, 2-Pin", LatestRevisionDate=17-Jul-2002, LatestRevisionNote="Re-released for DXP Platform.", Publisher="Altium Limited"
R1 R2 R4 R5 R7 R9 R10 R11 R12 R13 R14 R15 R16 R17 R18 R19 R20: library part CR0805-JW-204ELF, "RES SMD 200K OHM 5% 1/8W 0805", Device Package="0805 (2012 Metric)", Manufacturer="Bourns Inc.", Operating Temperature="-55°C ~ 155°C", Power (Watts)="0.125W, 1/8W", Resistance="200 kOhms", Supplier Device Package=0805, Supplier Part Number 1=118-CR0805-JW-204ELFCT-ND, Temperature Coefficient=±200ppm/°C, Tolerance=±5%, ComponentLink1Description=Datasheet, ComponentLink1URL=https://www.bourns.com/docs/product-datasheets/cr.pdf?sfvrsn=574d41f6_14, ComponentLink2Description="DigiKey Link", ComponentLink2URL=https://www.digikey.com/en/products/detail/bourns-inc/CR0805-JW-204ELF/3785267, Composition="Thick Film", Features="Moisture Resistant", Height - Seated (Max)="0.024\" (0.60mm)", LastUpdated="02/11/2023 20:02:13", Lifecycle Status=Active, Minimum Order=1, Number of Terminations=2, Package / Case="0805 (2012 Metric)", Packaging=TapeAndReel, Part Number=CR0805-JW-204ELF, Part Status=Active, PartId=69673, Price=0.01, Series=CR0805, Size / Dimension="0.079\" L x 0.049\" W (2.00mm x 1.25mm)", Supplier 1=DigiKey
R3 R6 R8: library part CSR2512C0R0005F, "RES SMD 500 UOHM 1% 3W 2512", Device Package="2512 (6432 Metric)", Manufacturer=Riedon, Operating Temperature="-55°C ~ 170°C", Power (Watts)=3W, Resistance="500 µOhms", Supplier Device Package=2512, Supplier Part Number 1=696-1183-1-ND, Temperature Coefficient=±100ppm/°C, Tolerance=±1%, ComponentLink1Description=Datasheet, ComponentLink1URL=https://riedon.com/media/pdf/CSR.pdf, ComponentLink2Description="DigiKey Link", ComponentLink2URL=http://digikey.com/product-detail/en/riedon/CSR2512C0R0005F/696-1183-1-ND/2813308, Composition="Metal Element", Features="Current Sense, Non-Inductive", Height - Seated (Max)="0.057\" (1.45mm)", LastUpdated="25/11/2023 21:15:30", Lifecycle Status=Active, Minimum Order=1, Number of Terminations=2, Packaging=TapeAndReel, Part Number=CSR2512C0R0005F, Part Status=Active, PartId=3098, Price=0.20, Series=CSR, Size / Dimension="0.250\" L x 0.118\" W (6.35mm x 3.00mm)", Supplier 1=DigiKey
U1 U2 U3 U4 U5: "No Description Available", Mfr_Name="Texas Instruments", Copyright="Copyright (C) 2023 Ultra Librarian. All rights reserved.", RefDes=RefDes, Type=DEV
  U1 U2: Manufacturer_Part_Number=INA180A1IDBVR
  U3 U4 U5: Manufacturer_Part_Number=LMV321IDBVR
W1 W2 W3: "Jumper Wire", LatestRevisionDate=17-Jul-2002, LatestRevisionNote="Re-released for DXP Platform.", PackageDescription="Radial Cap, Thru-Hole; 2 Leads; 0.2 in Pin Spacing", PackageReference=RAD-0.2, Published=24-Mar-1999, Publisher="Altium Limited"

## Free pads (board coordinates)
  round 5.08 hole 3: 4(94.854,23.446) 4(95.1,51.8) 4(95.3,80.7)

## Via types
v1: diameter 1.27, hole 0.711, Top Layer to Bottom Layer, 93 vias

## Nets (pads, with @x,y where several pads share a name; then routed paths per layer and width w, separated by ;. In a path a pad name is that pad's centre, name@x,y a point inside that pad or via, vN(x,y) a via of type N, cw(c..) or ccw(c..) an arc to the next point about the centre after c; other vN are vias at no path point)
AGND: B1.9 B2.9 B3.9 C1.2 C5.1 C6.2 C7.2 C8.2 C9.2 C13.1 C14.2 C15.2 C16.2 C17.2 C21.1 C22.2 C23.2 C24.1 C25.2 C26.2 C27.1 C28.1 C29.1 D10.1 D11.1 P2.1 R3.1 R6.1 R8.1 R16.2 R17.2 R18.2 U1.2 U1.4 U2.2 U2.4 U3.2 U4.2 U5.2 | length 102.1
  Top Layer w0.508: B3.9 25.555,4.155 26,4.6 C21.1 30.625,4.6 31.025,4.2 C22.2@31.163,4.2 ; B2.9 25.45,31.95 25.9,32.4 C13.1 30.223,32.4 30.663,31.96 C14.2 ; B1.9 25.338,61.155 25.486,61.303 26.379,61.303 C5.1 30.111,61.512 30.763,60.86 C6.2 ; v1(35.5,22.7) 35.515,22.715 38.277,22.715 R18.2@38.292,22.73 ; v1(37.409,50.922) C24.1@39.784,50.922 ; C27.1 38.964,63.515 v1(40.028,62.451) 40.028,62.373 40.901,61.5 C23.2 ; C28.1 39.144,36.001 40.182,34.963 40.182,34.779 41.055,33.906 41.055,32.745 C25.2 ; C29.1 39.668,9.732 39.668,8.438 40.5,7.606 v1(40.5,7.4) 41.5,6.4 C26.2 ; R17.2 39.575,47.8 39.575,44.9 v1(39.6,44.875) ; U3.2 43.394,68.8 44.144,68.05 v1(44.35,68.05) ; U4.2 v1(44.1,41.4) ; U5.2 41.713,14.525 42.878,14.525 42.903,14.5 44.157,14.5 v1(44.3,14.357) ; v1@44.185,55.09 R16.2@44.185,57.258 ; D10.1 49.5,71.1 54.418,66.182 55.018,66.182 55.1,66.1 ; D11.1 51.1,41.1 54.2,38 55.2,38 ; v1(55.9,52.2) 55.927,52.173 55.927,47.87 C16.2 ; C8.2@56.093,76.637 56.093,78.993 v1(56.1,79) ; 59.7,39 59.7,40.1 60.236,40.636 60.236,43.336 61.14,44.24 61.14,44.991 U2.4 ; U1.2 60.344,66.956 60.4,66.9 ; C7.2 61.132,76.604 63.696,76.604 v1(63.7,76.6) ; R3.1@61.14,64.121 R3.1@61.237,64.024 ; U2.4@61.193,44.844 61.193,47.893 C15.2 ; U1.4@61.248,73.308 C7.2@61.248,76.288
  other v1: 55.939,3.62 55.964,6.27 55.989,8.995 56.932,32.752 40.182,34.93 56.932,35.292 56.932,37.959 44.25,55.025 56.821,60.946 56.821,63.232 56.846,65.467
BOOTSTRAP_IC_A_INPUT: B1.16 C2.1 D1.2 | length 11
  Top Layer w0.508: D1.2 24.6,73.053 24.2,72.653 B1.16 30.308,70.045 30.663,70.4 C2.1
BOOTSTRAP_IC_B_INPUT: B2.16 C10.1 D4.2 | length 10.3
  Top Layer w0.508: D4.2@24.875,44.15 24.836,44.111 24.836,43.236 24.2,42.6 B2.16 24.271,40.911 25.711,40.911 26.1,41.3 C10.1
BOOTSTRAP_IC_C_INPUT: B3.16 C18.1 D7.2 | length 11.2
  Top Layer w0.508: D7.2@24.7,16.65 24.65,16.65 24.65,16.5 24.2,16.05 B3.16 25.445,13.045 26,13.6 28.1,13.6 28.4,13.3 C18.1
DISABLE_GPIO: B1.5 B2.5 B3.5 P1.9 | length 90.9
  Top Layer w0.508: v1@10.646,35.76 B2.5 ; v1(11,8.3) 11.206,8.3 11.541,7.965 B3.5 ; v1(13.875,64.7) 17.3,64.7 17.565,64.965 B1.5
  Bottom Layer w0.508: P1.9 5.209,52.316 ; v1(10.2,36) 8.4,36 ; v1(11,8.3) 6.844,12.456 6.844,29.019 8.4,30.575 8.4,36 ; v1(13.875,64.7) 13.956,64.619 13.956,58.379 7.893,52.316 5.209,52.316 ; 5.209,52.316 5.209,45.391 8.4,42.2 8.4,36
GND: B1.4 B2.4 B3.4 C3.1 C4.2 C11.1 C12.2 C19.1 C20.2 P1.10 R1.1 R4.1 R7.1 R9.2 R19.2 R20.2 W1.1 W2.1 W3.1 | length 113.5
  Top Layer w0.508: C4.2 10.437,71.4 10.837,71 C3.1 ; W1.1 13.235,59.885 13.725,60.375 R1.1@15.25,60.375 ; W3.1 13.23,2.73 13.861,3.361 14.961,3.361 R7.1 ; C20.2 11.137,15.2 11.537,14.8 C19.1 ; W2.1 14.83,30.53 15.5,31.2 R4.1 ; C12.2 11.487,41.975 11.862,41.6 C11.1 ; v1(13.9,37.3) 15.806,37.3 16.076,37.03 B2.4 ; v1(14.6,10) 14.806,10 15.571,9.235 B3.4 ; C3.1@15.05,70.8 C3.1@15.1,70.8 ; v1@16.006,66.175 v1(15.8,66.175) 15.83,66.205 18.77,66.205 B1.4 ; v1(35.4,38) 35.45,38.05 35.45,40.475 R19.2@35.5,40.525 ; v1(35.45,65.693) R9.2 ; v1(35.5,9.1) 35.55,9.15 35.55,13.55 R20.2 ; R20.2@35.75,13.55 R20.2@35.8,13.6
  Bottom Layer w0.508: v1(13.9,37.3) 29,37.3 29.675,36.625 34.025,36.625 v1(35.4,38) ; v1(14.6,10) 24.8,10 25.7,9.1 v1(35.5,9.1) ; v1(15.8,66.175) 15.818,66.193 23.959,66.193 25.052,65.1 33.249,65.1 33.842,65.693 v1(35.45,65.693)
NetB1_6: B1.6 R1.2 W1.2 | length 9.1
  Top Layer w0.508: W1.2 10.825,62.4 11.35,62.4 15.325,62.4 R1.2 15.543,62.568 16.468,62.568 17.595,63.695 B1.6 ; W1.2@10.825,62.455 W1.2@11.35,62.455
NetB1_11: B1.11 C5.2 C6.1 | length 6.8
  Top Layer w0.508: B1.11 24.271,63.624 26.476,63.624 C5.2 26.644,63.456 30.844,63.456 C6.1
NetB2_6: B2.6 R4.2 W2.2 | length 8.4
  Top Layer w0.508: W2.2 11.065,33.135 15.535,33.135 15.739,33.339 16.739,33.339 17.819,34.419 18.729,34.419 B2.6 ; W2.2@11,33.27 W2.2@11.018,33.288
NetB2_11: B2.11 C13.2 C14.1 | length 6.7
  Top Layer w0.508: B2.11 24.245,34.445 26.855,34.445 C13.2 26.95,34.45 30.75,34.45 C14.1
NetB3_6: B3.6 R7.2 W3.2 | length 8.4
  Top Layer w0.508: W3.2 11.065,5.335 14.935,5.335 15.139,5.539 16.139,5.539 17.295,6.695 B3.6
NetB3_11: B3.11 C21.2 C22.1 | length 7.3
  Top Layer w0.508: B3.11 24.248,6.648 C21.2@27.152,6.648 ; C21.2@27.1,6.5 C21.2@27.2,6.4 ; C21.2 27.27,6.67 31.093,6.67 C22.1@31.163,6.74 ; C22.1@30.963,6.4 C22.1
NetD9_1: D9.1 IC6.2 IC6.3 IC6.5 IC6.6 IC6.7 R8.2 | length 1.9
  Top Layer w0.508: IC6.5@72.512,7.154 IC6.5@74.412,7.154
  other v1: 69.324,5.566 69.324,8.36
PHA: B1.14 C2.2 D2.1 D3.2 IC1.2 IC1.3 IC1.5 IC1.6 IC1.7 IC2.8 pad.4@95.3,80.7 R11.1 | length 100.5
  Top Layer w0.508: B1.14 24.625,67.505 24.696,67.434 24.696,67.398 25.026,67.068 25.16,67.068 25.228,67 27.348,67 28.208,67.86 C2.2 33.5,65.16 33.5,57.8 v1(36.35,54.95) ; v1(51.1,57.043) 51.15,57.094 51.15,59.808 R11.1
  Bottom Layer w0.508: v1(36.35,54.95) 41.05,54.95 43.1,57 51.057,57 v1(51.1,57.043) ; v1@51.143,57.043 64.243,57.043 66.7,59.5 85.1,59.5 87.7,62.1 87.7,63.3 ; 85.599,64.121 86.615,64.121 pad.4@95.3,80.7
PHA_A_ADC: C8.1 D10.2 P1.2 R2.2 | length 82.7
  Top Layer w0.508: v1(5.2,42.4) 5.3,42.4 10,47.1 v1(10.1,47.1) ; D10.2@49.566,76.541 C8.1@54.397,76.541 ; R2.2 54.264,69.236 v1(54.3,69.2) ; R2.2@54.426,72.073 C8.1@54.426,76.57
  Bottom Layer w0.508: P1.2 5.2,37.21 v1(5.2,42.4) ; v1(10.1,47.1) 20.5,57.5 35.8,57.5 37.5,59.2 40.8,59.2 41.85,60.25 47.65,60.25 54.3,66.9 v1(54.3,69.2)
PHA_A_ADC_NF: R2.1 U1.1 | length 3.8
  Top Layer w0.508: R2.1@56.139,71.936 57.563,70.512 U1.1
PHA_B_ADC: C16.1 D11.2 P1.1 R5.1 | length 78.2
  Top Layer w0.508: v1(6.8,40.3) 6.8,41.5 v1(12.4,47.1) ; D11.2@51.159,47.784 C16.1@53.895,47.784 ; C16.1 53.977,47.82 53.977,43.023 R5.1 ; C16.1@53.977,47.866 v1@53.977,50.277
  Bottom Layer w0.508: P1.1 4.096,31.996 6.8,34.7 v1(6.8,40.3) ; v1(12.4,47.1) 18.5,53.2 45.1,53.2 47,55.1 51.2,55.1 54,52.3 v1(54,50.3)
PHA_B_ADC_NF: R5.2 U2.1 | length 3.6
  Top Layer w0.508: R5.2 56.139,42.861 57.039,42.861 57.613,42.287 U2.1
PHB: B2.14 C10.2 D5.1 D6.2 IC3.2 IC3.3 IC3.5 IC3.6 IC3.7 IC4.8 pad.4@95.1,51.8 R13.1 | length 85
  Top Layer w0.508: B2.14 24.625,38.3 24.925,38 29.803,38 30.563,38.76 C10.2 ; R13.1 46.8,46.6 47.7,45.7 v1(47.7,35.6)
  Bottom Layer w0.508: C10.2 31.86,38.76 33.775,40.675 37.625,40.675 42.7,35.6 v1(47.7,35.6) 55,42.9 90.318,42.9
PHC: B3.14 C18.2 D8.1 D9.2 IC5.2 IC5.3 IC5.5 IC5.6 IC5.7 IC6.8 pad.4@94.854,23.446 R15.1 | length 101.9
  Top Layer w0.508: B3.14 24.205,10.5 25.6,10.5 26,10.1 27.5,10.1 28.16,10.76 C18.2 ; R15.1 57.628,25.997 v1(63.6,20.025) 63.55,19.975 63.55,13.25 v1(63.5,13.2)
  Bottom Layer w0.508: C18.2 31.84,11.4 36.1,11.4 36.9,12.2 62.5,12.2 v1(63.5,13.2) ; v1(63.6,20.025) 63.6,18.3 65.8,16.1 82.398,16.1 85.072,18.774 89.136,18.774 ; 90.42,18.774 93.214,15.98
PHV_U: C27.2 R10.1 R11.2 R16.1 U3.1 | length 17.9
  Top Layer w0.508: U3.1 40.989,67.85 40.964,67.825 C27.2 40.971,64.743 43.843,64.743 v1(43.85,64.75) ; R16.1@45.996,57.318 45.996,59.858 R10.1 ; v1(46.1,62.3) 46.11,62.289 46.11,59.869 R10.1 ; R11.2@49.326,59.858 R11.2 R10.1
  Bottom Layer w0.508: v1(43.85,64.75) 43.85,64.65 46.1,62.4 v1(46.1,62.3)
PHV_V: C28.2 R12.1 R13.2 R17.1 U4.1 | length 25.9
  Top Layer w0.508: U4.1 41.169,40.45 41.144,40.425 C28.2 41.163,37.281 44.081,37.281 46.2,39.4 46.2,45.4 44.939,46.661 R13.2@44.939,47.761 ; R17.1 41.563,47.813 R13.2@44.787,47.813 ; R13.2 44.8,48.8 45.2,49.2 46.202,49.2 46.5,49.498 46.5,49.5 46.7,49.7 46.7,50.8 R12.1
PHV_W: C29.2 R14.1 R15.2 R18.1 U5.1 | length 28.3
  Top Layer w0.508: R14.1 R18.1 40.167,22.63 46.3,16.497 46.3,12.8 43.4,9.9 C29.2 ; R14.1@40.167,25.972 R15.2@43.079,25.972 ; C29.2@41.5,10.119 41.5,13.575 41.525,13.6 U5.1
PWM1_A: B1.1 P1.8 | length 47.5
  Top Layer w0.508: v1(16.3,76.4) 18.8,73.9 B1.1
  Bottom Layer w0.508: P1.8 0.7,51.602 0.7,69.3 9.337,77.937 14.763,77.937 v1(16.3,76.4)
PWM1_B: B1.2 P1.7 | length 46.4
  Top Layer w0.508: P1.7 2.582,47.292 3.592,47.292 4.7,48.4 4.7,64.236 v1(6.844,66.38) ; v1(12.3,76.3) 13.3,76.3 16.9,72.7 16.9,69.4 17.454,68.846 18.729,68.846 B1.2
  Bottom Layer w0.508: v1(6.844,66.38) 6.844,72.844 10.3,76.3 v1(12.3,76.3)
PWM2_A: B2.1 P1.6 | length 24.1
  Top Layer w0.508: P1.6 2.716,44.886 3.286,44.886 8.1,49.7 13.491,49.7 18.8,44.391 B2.1
PWM2_B: B2.2 P1.5 | length 25.3
  Top Layer w0.508: P1.5 8.97,48.6 13.1,48.6 17.3,44.4 17.3,39.868 17.598,39.57 B2.2
PWM3_A: B3.1 P1.4 | length 33.3
  Top Layer w0.508: P1.4 6.082,36.06 6.082,29.55 18.8,16.832 B3.1
PWM3_B: B3.2 P1.3 | length 32.6
  Top Layer w0.508: P1.3 4.939,34.663 4.939,28.661 17.2,16.4 17.2,12.4 17.754,11.846 18.729,11.846 B3.2
V3.3: C23.1 C25.1 C26.1 P1.12 U3.5 U4.5 U5.5 | length 134.2
  Top Layer w0.508: v1(8.9,56.525) 9.825,55.6 v1(25.6,55.6) ; U3.5 38.632,67.85 38.606,67.825 38.606,67.106 37.3,65.8 37.3,61.789 38.901,60.188 C23.1 38.963,59.976 38.963,57.637 v1(39.025,57.575) 39.025,54.925 33.6,49.5 33.6,32.6 ; U4.5 38.881,40.425 38.706,40.425 38.706,39.706 37.3,38.3 37.3,35.4 38.994,33.706 38.994,32.806 C25.1 ; C25.1@38.994,32.6 33.6,32.6 ; U5.5 39.025,13.6 39,13.575 39,12.5 37.6,11.1 37.6,7.8 v1(35.6,5.8) ; C26.1 36.676,4.9 35.776,5.8 v1(35.6,5.8) ; 33.6,32.6 33.6,7.8 v1(35.6,5.8)
  Bottom Layer w0.508: P1.12 5.937,56.525 v1(8.9,56.525) ; v1(25.6,55.6) 33.6,55.6 34.5,56.5 37.95,56.5 v1(39.025,57.575)
V5: B1.3 B1.8 B2.3 B2.8 B3.3 B3.8 C3.2 C4.1 C7.1 C11.2 C12.1 C15.1 C19.2 C20.1 P1.11 U1.5 U2.5 | length 141.2
  Top Layer w0.508: C4.1 10.37,68.93 15.08,68.93 15.15,69 16.645,67.505 B1.3 20.18,67.505 21.4,68.725 21.4,77.253 25.767,81.62 v1(27.672,81.62) ; C20.1@11.137,12.66 C20.1 11.07,12.73 15.03,12.73 C19.2 15.15,12.8 16.471,11.479 16.471,11.429 17.395,10.505 B3.3 ; C12.1 11.433,39.518 C11.2@15.418,39.518 ; C11.2 15.55,39.6 15.946,39.204 15.946,39.154 16.8,38.3 B2.3 ; v1(17.8,28.9) 18.8,29.9 B2.8 ; v1(17.9,2.1) 17.9,2.306 18.662,3.068 18.662,4.084 18.733,4.155 B3.8 ; v1(18,58.5) 18,58.706 18.8,59.506 B1.8 ; U2.5 59.286,45.237 59.2,45.323 59.2,53.2 52.9,59.5 52.9,65.2 47.6,70.5 47.6,78.1 50.2,80.7 v1(53.2,80.7) 58.2,80.7 59.326,79.574 C7.1@59.326,76.609 ; U1.5@59.361,73.295 C7.1@59.361,76.575
  Bottom Layer w0.508: v1(27.672,81.62) 31.18,81.62 35.879,76.921 46.421,76.921 50.2,80.7 v1(53.2,80.7)
V12: C1.1 C9.1 C17.1 D1.1 D2.2 D4.1 D5.2 D7.1 D8.2 IC1.8 IC3.8 IC5.8 P2.2 | length 18.7
  Top Layer w0.508: D1.1 24.612,77.288 30.688,77.288 C1.1 ; D7.1 D7.1@24.762,19.613 ; D7.1@24.711,19.539 24.7,19.55 24.807,19.657 31.183,19.657 C17.1 ; D4.1 30.163,47.3 30.563,47.7 C9.1
  other v1: 68.9,19.9 68.9,22.7 68.9,25.5 68.619,49.516 68.492,52.437 68.492,55.231 68.7,77.1 68.7,79.9 68.7,82.8
VIRTUAL_N: C24.2 R10.2 R12.2 R14.2 U3.3 U4.3 U5.3 | length 101.9
  Top Layer w0.508: v1(35.5,25.8) 35.574,25.874 38.093,25.874 38.093,27.493 40.5,29.9 45.8,29.9 49.8,33.9 49.8,36.9 49,37.7 49,52.694 48.7,52.994 v1(48.7,53.2) 45.8,53.2 44.8,52.2 R12.2 ; U3.3 43.099,69.75 43.549,70.2 45.1,70.2 46.938,68.362 46.938,65.338 44.121,62.521 R10.2 43.058,59.858 42.4,59.2 42.4,57.6 41.6,56.8 41.6,50.916 41.595,50.911 44.789,50.911 R12.2@44.789,50.989 ; U4.3 42.792,42.35 43.642,43.2 43.642,44.942 v1(43.7,45) ; v1(41.6,18.1) 41.644,18.056 41.644,15.525 41.669,15.5 U5.3
  Bottom Layer w0.508: v1(35.5,25.8) 41.454,19.846 41.454,18.246 v1(41.6,18.1) ; v1(43.7,45) 43.7,48.2 v1(48.7,53.2)
VOA_1: B1.15 IC1.1 | length 71.9
  Top Layer w0.508: B1.15 24.212,68.788 26.388,68.788 v1(26.4,68.8) ; IC1.1@84.716,75.596 86.616,75.596 IC1.1 87.231,75.742 87.377,75.596 v1(87.377,73.392)
  Bottom Layer w0.508: v1(26.4,68.8) 26.4,71.3 28.1,73 33.6,73 34.4,73.8 36.8,73.8 37.208,73.392 v1(87.377,73.392)
VOA_2: B2.15 IC3.1 | length 66.4
  Top Layer w0.508: B2.15 24.215,39.585 26.385,39.585 v1(26.4,39.6) ; IC3.1 86.142,47.241 v1(86.142,45.198)
  Bottom Layer w0.508: v1(26.4,39.6) 29.8,43 52.5,43 54.698,45.198 v1(86.142,45.198)
VOA_3: B3.15 IC5.1 | length 68.7
  Top Layer w0.508: B3.15 26.725,11.775 v1(26.8,11.7) ; IC5.1 86.088,18.531 v1(86.088,16.488)
  Bottom Layer w0.508: v1(26.8,11.7) 30.1,15 41.7,15 43.9,17.2 62.4,17.2 65.4,14.2 84.1,14.2 85.758,15.858 85.758,15.952 86.088,16.282 v1(86.088,16.488)
VOB_1: B1.10 IC2.1 | length 63.9
  Top Layer w0.508: B1.10 24.129,62.354 23.054,62.354 22.2,61.5 22.2,60.2 23.3,59.1 v1(24.3,59.1) ; v1(70.451,69.487) 70.499,69.44 75.272,69.44 IC2.1
  Bottom Layer w0.508: v1(24.3,59.1) 24.4,59 34,59 37.1,62.1 37.1,63.6 44.6,71.1 68.839,71.1 v1(70.451,69.487)
VOB_2: B2.10 IC4.1 | length 64.3
  Top Layer w0.508: B2.10 24.129,33.149 22.949,33.149 22,32.2 22,30.2 23.67,28.53 24.97,28.53 v1(25,28.5) ; v1(69.7,40.7) 69.705,40.695 74.461,40.695 IC4.1
  Bottom Layer w0.508: v1(25,28.5) 25.025,28.525 45.725,28.525 51.2,34 51.2,36.5 55.4,40.7 v1(69.7,40.7)
VOB_3: B3.10 IC6.1 | length 60.7
  Top Layer w0.508: B3.10@24.212,5.413 B3.10 24.129,5.354 23.154,5.354 22,4.2 22,3 23.2,1.8 v1(24.9,1.8) ; v1(69.324,12.17) IC6.1
  Bottom Layer w0.508: v1(24.9,1.8) 40.1,1.8 48.9,10.6 67.754,10.6 v1(69.324,12.17)
VPS_A: D3.1 IC2.2 IC2.3 IC2.5 IC2.6 IC2.7 R3.2 U1.3 | length 8.8
  Top Layer w0.508: U1.3 61.294,69.406 62,68.7 65.8,68.7 67.2,67.3 67.2,66.5 ; 66.85,66.325 66.894,66.369 ; R3.2@66.856,64.121 R3.2@66.894,64.159
  other v1: 70.994,62.47 70.994,65.264
VPS_B: D6.1 IC4.2 IC4.3 IC4.5 IC4.6 IC4.7 R6.2 U2.3 | length 10.4
  Top Layer w0.508: U2.3 65.113,42.287 68.5,38.9 68.5,38 ; R6.2@67.075,35.811 67.562,35.324 ; 67.075,37.55 67.075,37.625 67.086,37.636
  other v1: 70.14,34.022 70.14,36.816
ZCD_PHV_U: P1.15 R9.1 U3.4 | length 45.5
  Top Layer w0.508: v1(35.4,71.6) 35.425,71.575 35.425,69.9 R9.1 35.55,69.775 38.745,69.775 U3.4
  Bottom Layer w0.508: P1.15 5.957,64.125 7.9,64.125 11.275,67.5 24.8,67.5 26.2,66.1 31.7,66.1 33.3,67.7 33.3,70.9 34,71.6 v1(35.4,71.6)
ZCD_PHV_V: P1.14 R19.1 U4.4 | length 52.6
  Top Layer w0.508: v1(7.125,62.05) 7.125,55.4 12.025,50.5 v1(18.2,50.5) ; v1(35.4,44.9) 35.45,44.85 35.45,42.45 R19.1 38.399,42.4 38.449,42.35 U4.4
  Bottom Layer w0.508: P1.14 5.517,62.025 7.1,62.025 v1(7.125,62.05) ; v1(18.2,50.5) 32.3,50.5 35.4,47.4 v1(35.4,44.9)
ZCD_PHV_W: P1.13 R20.1 U5.4 | length 83
  Top Layer w0.508: P1.13 0.7,60.65 0.7,26.9 5.55,22.05 v1(8.4,22.05) ; R20.1@35.5,15.7 R20.1 v1(35.6,17.6) 37.8,17.6 39.156,16.244 39.156,15.525 39.182,15.5 U5.4
  Bottom Layer w0.508: v1(8.4,22.05) 8.45,22 32.5,22 35.6,18.9 v1(35.6,17.6)
pads on no net: B1.7 B1.12 B1.13 B2.7 B2.12 B2.13 B3.7 B3.12 B3.13

## Polygon pours and split planes (outlines as drawn)
AGND on Int1 (GND) "AGND_L02_P001" (solid, pour order 1): 22.7,87 100,87 100,0 22.7,0
GND on Int1 (GND) "GND_L02_P000" (solid, pour order 0): 0,87 20.3,87 20.3,0 0,0
V12 on Int2 (V12) "V12_L03_P003" (solid, pour order 3): 28.2,87 100,87 100,0 28.2,0
V5 on Int2 (V12) "V5_L03_P002" (solid, pour order 2): 0.051,87 20.3,87 20.3,0 -0.051,0
V12 on Top Layer "V12_L01_P004" (solid, pour order 4): 82.6,73.265 82.885,73.55 82.932,73.55 82.932,85.65 82.66,85.965 69.065,85.965 66.5,83.4 66.5,76 69.235,73.265
NetD9_1 on Top Layer "NETD9_1_L01_P018" (solid, pour order 18): 67.75,3.3 66.195,3.3 64.244,4.935 64.244,9.122 65.006,9.884 69.959,9.884 71.575,11.5 76.225,11.5 76.575,11.15 76.575,4.125 75.75,3.3
PHA on Top Layer "PHA_L01_P007" (solid, pour order 7): 78.741,71.075 79.216,71.55 79.4,71.614 89.664,71.614 90.2,72.15 90.2,75.999 89.751,76.44 84.075,76.44 83.821,76.694 83.821,84.568 91.132,84.568 96.767,84.568 98.8,82.535 98.8,65.635 95.6,61.835 92.076,61.835 89.536,59.295 79.2,59.295 78.775,59.775 78.741,59.775
PHB on Top Layer "PHB_L01_P009" (solid, pour order 9): 83.391,55.764 83.62,55.993 89.825,55.993 96.507,55.993 98.5,54 98.5,35.917 94.7,32.117 90.714,32.117 89.19,30.593 78.55,30.593 78.268,30.857 78.268,42.912 78.522,43.166 88.891,43.166 89.375,43.65 89.375,47.475 88.858,47.992 83.391,47.992
AGND on Top Layer "AGND_L01_P012" (solid, pour order 12): 57.505,39.7 57.931,39.274 60.059,39.277 61.504,37.832 61.504,32.3 61.22,31.99 59.545,31.99 58.455,30.9 55.805,30.9 54.93,31.775 54.93,38.875 55.755,39.7
AGND on Top Layer "AGND_L01_P019" (solid, pour order 19): 60.614,4.197 59.52,3.102 58.681,3.102 57.049,1.47 54.389,1.47 53.689,2.17 53.689,10.27 53.764,10.27 54.564,11.07 56.764,11.07 57.614,10.22 59.844,10.22 60.614,9.45
V12 on Top Layer "V12_L01_P008" (solid, pour order 8): 81.775,44.817 82.133,45.175 82.15,45.175 82.15,57.064 81.824,57.39 67.99,57.39 66.1,55.5 66.1,48 69.283,44.817
PHC on Top Layer "PHC_L01_P017" (solid, pour order 17): 77.85,2.35 78.2,2 89.5,2 91.6,4.1 94.8,4.1 98.1,8.2 98.1,25.5 96.444,27.156 90.544,27.156 83.548,27.156 83.35,26.958 83.35,19.7 83.35,19.45 83.6,19.2 88.1,19.2 88.6,18.7 88.6,15.7 87.6,14.7 78.35,14.7 77.85,14.2
V12 on Top Layer "V12_L01_P015" (solid, pour order 15): 66.4,26.2 66.4,18.5 68.7,16.2 81.6,16.2 82.1,16.7 82.1,27.95 81.1,28.95 69.15,28.95
AGND on Top Layer "AGND_L01_P014" (solid, pour order 14): 61.973,61.025 62.739,61.868 62.739,66.077 61.774,67.042 58.109,67.042 58.062,67.042 57.686,67.418 55.668,67.399 54.899,66.758 54.899,60.6 55.85,59.649 58.868,59.649 60.244,61.025
VPS_A on Top Layer "VPS_A_L01_P013" (solid, pour order 13): 65.914,60.952 66.566,60.3 66.575,60.311 77.09,60.311 77.852,61.073 77.852,68.566 72.264,68.566 70.298,66.6 66.336,66.6 65.914,66.178
VPS_B on Top Layer "VPS_B_L01_P011" (solid, pour order 11): 65.568,38.086 64.806,37.324 64.806,33.006 65.568,32.244 67.092,32.244 67.6,31.736 76.934,31.736 76.934,39.864 71.156,39.864 69.378,38.086
PHA on Bottom Layer "PHA_L04_P026" (solid, pour order 26): 83.44,64.248 84.71,62.978 94.87,62.978 98.9,67.008 98.9,82.2 96.6,84.5 85.404,84.5 83.948,83.044 83.948,78.472 84.71,77.71 88.52,77.71 89.79,76.44 89.79,71.106 87.504,68.82 84.71,68.82 83.44,67.55
VPS_A on Bottom Layer "VPS_A_L04_P028" (solid, pour order 28): 81.916,67.55 81.916,63.74 81.154,62.978 74.55,62.978 72.518,60.946 67.438,60.946 66.676,61.708 66.676,65.772 68.708,67.804 81.662,67.804
V12 on Bottom Layer "V12_L04_P027" (solid, pour order 27): 82.424,78.472 81.408,77.456 74.296,77.456 71.756,74.916 68.454,74.916 67.438,75.932 67.438,83.806 69.216,85.584 73.026,85.584 74.804,83.806 81.662,83.806 82.424,83.044
VPS_B on Bottom Layer "VPS_B_L04_P025" (solid, pour order 25): 81.062,38.34 81.062,33.768 80.3,33.006 74.458,33.006 72.68,31.228 69.822,31.228 68.362,32.396 68.362,38.086 69.378,39.102 74.458,39.102 74.966,38.594 80.554,38.594
V12 on Bottom Layer "V12_L04_P024" (solid, pour order 24): 81.57,54.088 81.57,50.278 80.554,49.262 73.95,49.262 71.918,47.23 67.346,47.23 66.33,48.246 66.33,56.12 68.362,58.152 71.664,58.152 74.458,55.358 80.3,55.358
PHB on Bottom Layer "PHB_L04_P023" (solid, pour order 23): 83.094,53.834 83.094,50.024 83.856,49.262 87.666,49.262 89.444,47.484 89.444,39.864 88.428,38.848 82.84,38.848 82.332,38.34 82.332,34.022 83.348,33.006 95.032,33.006 98.7,36.674 98.7,53.2 96.4,55.5 84.094,55.5
NetD9_1 on Bottom Layer "NETD9_1_L04_P022" (solid, pour order 22): 81.262,11.916 81.262,7.852 79.992,6.582 75.674,6.582 72.372,3.28 65.26,3.28 64.752,3.788 64.752,9.376 65.514,10.138 71.61,10.138 73.896,12.424 80.754,12.424
V12 on Bottom Layer "V12_L04_P021" (solid, pour order 21): 73.134,20.298 80.246,20.298 81.516,21.568 81.516,26.14 81.008,26.648 73.642,26.648 71.61,28.68 67.8,28.68 66.53,27.41 66.53,18.52 67.292,17.758 70.594,17.758
PHC on Bottom Layer "PHC_L04_P020" (solid, pour order 20): 98.5,25 98.5,10.764 94.8,7.065 83.446,7.065 82.583,7.928 82.583,11.713 83.243,12.373 87.968,12.373 88.933,13.338 88.933,19.333 88.069,20.196 84.564,20.196 82.964,21.797 82.964,27.181 83.675,28.045 95.455,28.045

## Silkscreen, mask and mechanical layers (free items; w line width, h text height)
Top Overlay:
  text "BLDC Bridge Board 1.0" at 1.9,83.6 h2.54
  text "Designed by Mgm" at 1.8,81.179 h2.54